# EAGLE board untitled2 (EAGLE 6.0)

Size 81.28 x 81.28 mm. Coordinates in mm from the lower left corner, seen from the top.
Outline: 0,0 81.28,0 81.28,81.28 0,81.28 0,0
Copper layers (1*16): Top 0.035mm / dielectric 1.5mm / Bottom 0.035mm
Design rules: minimum track width 10mil, minimum drill 24mil, track to track 8mil, track to pad 8mil, pad to pad 8mil, via to via 8mil, smd to smd 8mil, copper to edge 30mil, drill to drill 8mil, minimum pad ring 10mil, minimum via ring 8mil, stop-mask expansion 4mil, vias tented up to drill 0mil, thermal gap 10mil

## Footprints (pad centres in the part's own frame; a part is rotated, then mirrored left to right if it is on the bottom)
LED3MM = drill 0.813 octagon: A -1.27,0; K 1.27,0

## Placement (x,y rotation side)
E$1  [LED3MM]  2.54,2.54 0 top
E$2  [LED3MM]  7.62,2.54 0 top
E$3  [LED3MM]  12.7,2.54 0 top
E$4  [LED3MM]  17.78,2.54 0 top
E$5  [LED3MM]  2.54,7.62 0 top
E$6  [LED3MM]  7.62,7.62 0 top
E$7  [LED3MM]  12.7,7.62 0 top
E$8  [LED3MM]  17.78,7.62 0 top
E$9  [LED3MM]  2.54,12.7 0 top
E$10  [LED3MM]  7.62,12.7 0 top
E$11  [LED3MM]  12.7,12.7 0 top
E$12  [LED3MM]  17.78,12.7 0 top
E$13  [LED3MM]  2.54,17.78 0 top
E$14  [LED3MM]  7.62,17.78 0 top
E$15  [LED3MM]  12.7,17.78 0 top
E$16  [LED3MM]  17.78,17.78 0 top
E$17  [LED3MM]  22.86,2.54 0 top
E$18  [LED3MM]  27.94,2.54 0 top
E$19  [LED3MM]  33.02,2.54 0 top
E$20  [LED3MM]  38.1,2.54 0 top
E$21  [LED3MM]  22.86,7.62 0 top
E$22  [LED3MM]  27.94,7.62 0 top
E$23  [LED3MM]  33.02,7.62 0 top
E$24  [LED3MM]  38.1,7.62 0 top
E$25  [LED3MM]  22.86,12.7 0 top
E$26  [LED3MM]  27.94,12.7 0 top
E$27  [LED3MM]  33.02,12.7 0 top
E$28  [LED3MM]  38.1,12.7 0 top
E$29  [LED3MM]  22.86,17.78 0 top
E$30  [LED3MM]  27.94,17.78 0 top
E$31  [LED3MM]  33.02,17.78 0 top
E$32  [LED3MM]  38.1,17.78 0 top
E$33  [LED3MM]  2.54,22.86 0 top
E$34  [LED3MM]  7.62,22.86 0 top
E$35  [LED3MM]  12.7,22.86 0 top
E$36  [LED3MM]  17.78,22.86 0 top
E$37  [LED3MM]  2.54,27.94 0 top
E$38  [LED3MM]  7.62,27.94 0 top
E$39  [LED3MM]  12.7,27.94 0 top
E$40  [LED3MM]  17.78,27.94 0 top
E$41  [LED3MM]  2.54,33.02 0 top
E$42  [LED3MM]  7.62,33.02 0 top
E$43  [LED3MM]  12.7,33.02 0 top
E$44  [LED3MM]  17.78,33.02 0 top
E$45  [LED3MM]  2.54,38.1 0 top
E$46  [LED3MM]  7.62,38.1 0 top
E$47  [LED3MM]  12.7,38.1 0 top
E$48  [LED3MM]  17.78,38.1 0 top
E$49  [LED3MM]  22.86,22.86 0 top
E$50  [LED3MM]  27.94,22.86 0 top
E$51  [LED3MM]  33.02,22.86 0 top
E$52  [LED3MM]  38.1,22.86 0 top
E$53  [LED3MM]  22.86,27.94 0 top
E$54  [LED3MM]  27.94,27.94 0 top
E$55  [LED3MM]  33.02,27.94 0 top
E$56  [LED3MM]  38.1,27.94 0 top
E$57  [LED3MM]  22.86,33.02 0 top
E$58  [LED3MM]  27.94,33.02 0 top
E$59  [LED3MM]  33.02,33.02 0 top
E$60  [LED3MM]  38.1,33.02 0 top
E$61  [LED3MM]  22.86,38.1 0 top
E$62  [LED3MM]  27.94,38.1 0 top
E$63  [LED3MM]  33.02,38.1 0 top
E$64  [LED3MM]  38.1,38.1 0 top
E$65  [LED3MM]  2.54,43.18 0 top
E$66  [LED3MM]  7.62,43.18 0 top
E$67  [LED3MM]  12.7,43.18 0 top
E$68  [LED3MM]  17.78,43.18 0 top
E$69  [LED3MM]  2.54,48.26 0 top
E$70  [LED3MM]  7.62,48.26 0 top
E$71  [LED3MM]  12.7,48.26 0 top
E$72  [LED3MM]  17.78,48.26 0 top
E$73  [LED3MM]  2.54,53.34 0 top
E$74  [LED3MM]  7.62,53.34 0 top
E$75  [LED3MM]  12.7,53.34 0 top
E$76  [LED3MM]  17.78,53.34 0 top
E$77  [LED3MM]  2.54,58.42 0 top
E$78  [LED3MM]  7.62,58.42 0 top
E$79  [LED3MM]  12.7,58.42 0 top
E$80  [LED3MM]  17.78,58.42 0 top
E$81  [LED3MM]  22.86,43.18 0 top
E$82  [LED3MM]  27.94,43.18 0 top
E$83  [LED3MM]  33.02,43.18 0 top
E$84  [LED3MM]  38.1,43.18 0 top
E$85  [LED3MM]  22.86,48.26 0 top
E$86  [LED3MM]  27.94,48.26 0 top
E$87  [LED3MM]  33.02,48.26 0 top
E$88  [LED3MM]  38.1,48.26 0 top
E$89  [LED3MM]  22.86,53.34 0 top
E$90  [LED3MM]  27.94,53.34 0 top
E$91  [LED3MM]  33.02,53.34 0 top
E$92  [LED3MM]  38.1,53.34 0 top
E$93  [LED3MM]  22.86,58.42 0 top
E$94  [LED3MM]  27.94,58.42 0 top
E$95  [LED3MM]  33.02,58.42 0 top
E$96  [LED3MM]  38.1,58.42 0 top
E$97  [LED3MM]  2.54,63.5 0 top
E$98  [LED3MM]  7.62,63.5 0 top
E$99  [LED3MM]  12.7,63.5 0 top
E$100  [LED3MM]  17.78,63.5 0 top
E$101  [LED3MM]  2.54,68.58 0 top
E$102  [LED3MM]  7.62,68.58 0 top
E$103  [LED3MM]  12.7,68.58 0 top
E$104  [LED3MM]  17.78,68.58 0 top
E$105  [LED3MM]  2.54,73.66 0 top
E$106  [LED3MM]  7.62,73.66 0 top
E$107  [LED3MM]  12.7,73.66 0 top
E$108  [LED3MM]  17.78,73.66 0 top
E$109  [LED3MM]  2.54,78.74 0 top
E$110  [LED3MM]  7.62,78.74 0 top
E$111  [LED3MM]  12.7,78.74 0 top
E$112  [LED3MM]  17.78,78.74 0 top
E$113  [LED3MM]  22.86,63.5 0 top
E$114  [LED3MM]  27.94,63.5 0 top
E$115  [LED3MM]  33.02,63.5 0 top
E$116  [LED3MM]  38.1,63.5 0 top
E$117  [LED3MM]  22.86,68.58 0 top
E$118  [LED3MM]  27.94,68.58 0 top
E$119  [LED3MM]  33.02,68.58 0 top
E$120  [LED3MM]  38.1,68.58 0 top
E$121  [LED3MM]  22.86,73.66 0 top
E$122  [LED3MM]  27.94,73.66 0 top
E$123  [LED3MM]  33.02,73.66 0 top
E$124  [LED3MM]  38.1,73.66 0 top
E$125  [LED3MM]  22.86,78.74 0 top
E$126  [LED3MM]  27.94,78.74 0 top
E$127  [LED3MM]  33.02,78.74 0 top
E$128  [LED3MM]  38.1,78.74 0 top
E$129  [LED3MM]  43.18,2.54 0 top
E$130  [LED3MM]  48.26,2.54 0 top
E$131  [LED3MM]  53.34,2.54 0 top
E$132  [LED3MM]  58.42,2.54 0 top
E$133  [LED3MM]  43.18,7.62 0 top
E$134  [LED3MM]  48.26,7.62 0 top
E$135  [LED3MM]  53.34,7.62 0 top
E$136  [LED3MM]  58.42,7.62 0 top
E$137  [LED3MM]  43.18,12.7 0 top
E$138  [LED3MM]  48.26,12.7 0 top
E$139  [LED3MM]  53.34,12.7 0 top
E$140  [LED3MM]  58.42,12.7 0 top
E$141  [LED3MM]  43.18,17.78 0 top
E$142  [LED3MM]  48.26,17.78 0 top
E$143  [LED3MM]  53.34,17.78 0 top
E$144  [LED3MM]  58.42,17.78 0 top
E$145  [LED3MM]  63.5,2.54 0 top
E$146  [LED3MM]  68.58,2.54 0 top
E$147  [LED3MM]  73.66,2.54 0 top
E$148  [LED3MM]  78.74,2.54 0 top
E$149  [LED3MM]  63.5,7.62 0 top
E$150  [LED3MM]  68.58,7.62 0 top
E$151  [LED3MM]  73.66,7.62 0 top
E$152  [LED3MM]  78.74,7.62 0 top
E$153  [LED3MM]  63.5,12.7 0 top
E$154  [LED3MM]  68.58,12.7 0 top
E$155  [LED3MM]  73.66,12.7 0 top
E$156  [LED3MM]  78.74,12.7 0 top
E$157  [LED3MM]  63.5,17.78 0 top
E$158  [LED3MM]  68.58,17.78 0 top
E$159  [LED3MM]  73.66,17.78 0 top
E$160  [LED3MM]  78.74,17.78 0 top
E$161  [LED3MM]  43.18,22.86 0 top
E$162  [LED3MM]  48.26,22.86 0 top
E$163  [LED3MM]  53.34,22.86 0 top
E$164  [LED3MM]  58.42,22.86 0 top
E$165  [LED3MM]  43.18,27.94 0 top
E$166  [LED3MM]  48.26,27.94 0 top
E$167  [LED3MM]  53.34,27.94 0 top
E$168  [LED3MM]  58.42,27.94 0 top
E$169  [LED3MM]  43.18,33.02 0 top
E$170  [LED3MM]  48.26,33.02 0 top
E$171  [LED3MM]  53.34,33.02 0 top
E$172  [LED3MM]  58.42,33.02 0 top
E$173  [LED3MM]  43.18,38.1 0 top
E$174  [LED3MM]  48.26,38.1 0 top
E$175  [LED3MM]  53.34,38.1 0 top
E$176  [LED3MM]  58.42,38.1 0 top
E$177  [LED3MM]  63.5,22.86 0 top
E$178  [LED3MM]  68.58,22.86 0 top
E$179  [LED3MM]  73.66,22.86 0 top
E$180  [LED3MM]  78.74,22.86 0 top
E$181  [LED3MM]  63.5,27.94 0 top
E$182  [LED3MM]  68.58,27.94 0 top
E$183  [LED3MM]  73.66,27.94 0 top
E$184  [LED3MM]  78.74,27.94 0 top
E$185  [LED3MM]  63.5,33.02 0 top
E$186  [LED3MM]  68.58,33.02 0 top
E$187  [LED3MM]  73.66,33.02 0 top
E$188  [LED3MM]  78.74,33.02 0 top
E$189  [LED3MM]  63.5,38.1 0 top
E$190  [LED3MM]  68.58,38.1 0 top
E$191  [LED3MM]  73.66,38.1 0 top
E$192  [LED3MM]  78.74,38.1 0 top
E$193  [LED3MM]  43.18,43.18 0 top
E$194  [LED3MM]  48.26,43.18 0 top
E$195  [LED3MM]  53.34,43.18 0 top
E$196  [LED3MM]  58.42,43.18 0 top
E$197  [LED3MM]  43.18,48.26 0 top
E$198  [LED3MM]  48.26,48.26 0 top
E$199  [LED3MM]  53.34,48.26 0 top
E$200  [LED3MM]  58.42,48.26 0 top
E$201  [LED3MM]  43.18,53.34 0 top
E$202  [LED3MM]  48.26,53.34 0 top
E$203  [LED3MM]  53.34,53.34 0 top
E$204  [LED3MM]  58.42,53.34 0 top
E$205  [LED3MM]  43.18,58.42 0 top
E$206  [LED3MM]  48.26,58.42 0 top
E$207  [LED3MM]  53.34,58.42 0 top
E$208  [LED3MM]  58.42,58.42 0 top
E$209  [LED3MM]  63.5,43.18 0 top
E$210  [LED3MM]  68.58,43.18 0 top
E$211  [LED3MM]  73.66,43.18 0 top
E$212  [LED3MM]  78.74,43.18 0 top
E$213  [LED3MM]  63.5,48.26 0 top
E$214  [LED3MM]  68.58,48.26 0 top
E$215  [LED3MM]  73.66,48.26 0 top
E$216  [LED3MM]  78.74,48.26 0 top
E$217  [LED3MM]  63.5,53.34 0 top
E$218  [LED3MM]  68.58,53.34 0 top
E$219  [LED3MM]  73.66,53.34 0 top
E$220  [LED3MM]  78.74,53.34 0 top
E$221  [LED3MM]  63.5,58.42 0 top
E$222  [LED3MM]  68.58,58.42 0 top
E$223  [LED3MM]  73.66,58.42 0 top
E$224  [LED3MM]  78.74,58.42 0 top
E$225  [LED3MM]  43.18,63.5 0 top
E$226  [LED3MM]  48.26,63.5 0 top
E$227  [LED3MM]  53.34,63.5 0 top
E$228  [LED3MM]  58.42,63.5 0 top
E$229  [LED3MM]  43.18,68.58 0 top
E$230  [LED3MM]  48.26,68.58 0 top
E$231  [LED3MM]  53.34,68.58 0 top
E$232  [LED3MM]  58.42,68.58 0 top
E$233  [LED3MM]  43.18,73.66 0 top
E$234  [LED3MM]  48.26,73.66 0 top
E$235  [LED3MM]  53.34,73.66 0 top
E$236  [LED3MM]  58.42,73.66 0 top
E$237  [LED3MM]  43.18,78.74 0 top
E$238  [LED3MM]  48.26,78.74 0 top
E$239  [LED3MM]  53.34,78.74 0 top
E$240  [LED3MM]  58.42,78.74 0 top
E$241  [LED3MM]  63.5,63.5 0 top
E$242  [LED3MM]  68.58,63.5 0 top
E$243  [LED3MM]  73.66,63.5 0 top
E$244  [LED3MM]  78.74,63.5 0 top
E$245  [LED3MM]  63.5,68.58 0 top
E$246  [LED3MM]  68.58,68.58 0 top
E$247  [LED3MM]  73.66,68.58 0 top
E$248  [LED3MM]  78.74,68.58 0 top
E$249  [LED3MM]  63.5,73.66 0 top
E$250  [LED3MM]  68.58,73.66 0 top
E$251  [LED3MM]  73.66,73.66 0 top
E$252  [LED3MM]  78.74,73.66 0 top
E$253  [LED3MM]  63.5,78.74 0 top
E$254  [LED3MM]  68.58,78.74 0 top
E$255  [LED3MM]  73.66,78.74 0 top
E$256  [LED3MM]  78.74,78.74 0 top

## Library data of the parts
E$1-E$256 = led

## Nets
S$1: E$1.A E$5.A E$9.A E$13.A E$33.A E$37.A E$41.A E$45.A E$65.A E$69.A E$73.A E$77.A E$97.A E$101.A E$105.A
S$2: E$2.A E$6.A E$10.A E$14.A E$34.A E$38.A E$42.A E$46.A E$66.A E$70.A E$74.A E$78.A E$98.A E$102.A E$110.A
S$3: E$3.A E$7.A E$11.A E$15.A E$35.A E$39.A E$43.A E$47.A E$67.A E$71.A E$75.A E$79.A E$99.A E$107.A E$111.A
S$4: E$4.A E$8.A E$12.A E$16.A E$36.A E$40.A E$44.A E$48.A E$68.A E$72.A E$76.A E$80.A E$104.A E$108.A E$112.A
S$5: E$17.A E$21.A E$25.A E$29.A E$49.A E$53.A E$57.A E$61.A E$81.A E$85.A E$89.A E$113.A E$117.A E$121.A E$125.A
S$6: E$18.A E$22.A E$26.A E$30.A E$50.A E$54.A E$58.A E$62.A E$82.A E$86.A E$94.A E$114.A E$118.A E$122.A E$126.A
S$7: E$19.A E$23.A E$27.A E$31.A E$51.A E$55.A E$59.A E$63.A E$83.A E$91.A E$95.A E$115.A E$119.A E$123.A E$127.A
S$8: E$84.A E$87.A E$90.A E$93.A E$100.A E$103.A E$106.A E$109.A E$148.A E$151.A E$154.A E$157.A E$164.A E$167.A E$170.A E$173.A
S$9: E$152.A E$156.A E$160.A E$180.A E$184.A E$188.A E$192.A E$212.A E$216.A E$220.A E$224.A E$244.A E$248.A E$252.A E$256.A
S$10: E$147.A E$155.A E$159.A E$179.A E$183.A E$187.A E$191.A E$211.A E$215.A E$219.A E$223.A E$243.A E$247.A E$251.A E$255.A
S$11: E$146.A E$150.A E$158.A E$178.A E$182.A E$186.A E$190.A E$210.A E$214.A E$218.A E$222.A E$242.A E$246.A E$250.A E$254.A
S$12: E$145.A E$149.A E$153.A E$177.A E$181.A E$185.A E$189.A E$209.A E$213.A E$217.A E$221.A E$241.A E$245.A E$249.A E$253.A
S$13: E$132.A E$136.A E$140.A E$144.A E$168.A E$172.A E$176.A E$196.A E$200.A E$204.A E$208.A E$228.A E$232.A E$236.A E$240.A
S$14: E$131.A E$135.A E$139.A E$143.A E$163.A E$171.A E$175.A E$195.A E$199.A E$203.A E$207.A E$227.A E$231.A E$235.A E$239.A
S$15: E$130.A E$134.A E$138.A E$142.A E$162.A E$166.A E$174.A E$194.A E$198.A E$202.A E$206.A E$226.A E$230.A E$234.A E$238.A
S$16: E$129.A E$133.A E$137.A E$141.A E$161.A E$165.A E$169.A E$193.A E$197.A E$201.A E$205.A E$225.A E$229.A E$233.A E$237.A
S$17: E$20.A E$24.A E$28.A E$32.A E$52.A E$56.A E$60.A E$64.A E$88.A E$92.A E$96.A E$116.A E$120.A E$124.A E$128.A
S$18: E$1.K E$2.K E$3.K E$4.K E$17.K E$18.K E$19.K E$20.K E$129.K E$130.K E$131.K E$132.K E$145.K E$146.K E$147.K E$148.K
S$19: E$5.K E$6.K E$7.K E$8.K E$21.K E$22.K E$23.K E$24.K E$133.K E$134.K E$135.K E$136.K E$149.K E$150.K E$151.K E$152.K
S$20: E$9.K E$10.K E$11.K E$12.K E$25.K E$26.K E$27.K E$28.K E$137.K E$138.K E$139.K E$140.K E$153.K E$154.K E$155.K E$156.K
S$21: E$13.K E$14.K E$15.K E$16.K E$29.K E$30.K E$31.K E$32.K E$141.K E$142.K E$143.K E$144.K E$157.K E$158.K E$159.K E$160.K
S$22: E$33.K E$34.K E$35.K E$36.K E$49.K E$50.K E$51.K E$52.K E$161.K E$162.K E$163.K E$164.K E$177.K E$178.K E$179.K E$180.K
S$23: E$37.K E$38.K E$39.K E$40.K E$53.K E$54.K E$55.K E$56.K E$165.K E$166.K E$167.K E$168.K E$181.K E$182.K E$183.K E$184.K
S$24: E$41.K E$42.K E$43.K E$44.K E$57.K E$58.K E$59.K E$60.K E$169.K E$170.K E$171.K E$172.K E$185.K E$186.K E$187.K E$188.K
S$25: E$45.K E$46.K E$47.K E$48.K E$61.K E$62.K E$63.K E$64.K E$173.K E$174.K E$175.K E$176.K E$189.K E$190.K E$191.K E$192.K
S$26: E$65.K E$66.K E$67.K E$68.K E$81.K E$82.K E$83.K E$84.K E$193.K E$194.K E$195.K E$196.K E$209.K E$210.K E$211.K E$212.K
S$27: E$69.K E$70.K E$71.K E$72.K E$85.K E$86.K E$87.K E$88.K E$197.K E$198.K E$199.K E$200.K E$213.K E$214.K E$215.K E$216.K
S$28: E$73.K E$74.K E$75.K E$76.K E$89.K E$90.K E$91.K E$92.K E$201.K E$202.K E$203.K E$204.K E$217.K E$218.K E$219.K E$220.K
S$29: E$77.K E$78.K E$79.K E$80.K E$93.K E$94.K E$95.K E$96.K E$205.K E$206.K E$207.K E$208.K E$221.K E$222.K E$223.K E$224.K
S$30: E$97.K E$98.K E$99.K E$100.K E$113.K E$114.K E$115.K E$116.K E$225.K E$226.K E$227.K E$228.K E$241.K E$242.K E$243.K E$244.K
S$31: E$101.K E$102.K E$103.K E$104.K E$117.K E$118.K E$119.K E$120.K E$229.K E$230.K E$231.K E$232.K E$245.K E$246.K E$247.K E$248.K
S$32: E$105.K E$106.K E$107.K E$108.K E$121.K E$122.K E$123.K E$124.K E$233.K E$234.K E$235.K E$236.K E$249.K E$250.K E$251.K E$252.K
S$33: E$109.K E$110.K E$111.K E$112.K E$125.K E$126.K E$127.K E$128.K E$237.K E$238.K E$239.K E$240.K E$253.K E$254.K E$255.K E$256.K

## Tracks (layer width: path | path; a pad name or v marks a point on that pad's centre or on a via)
S$1  (14 unrouted)
S$2  (14 unrouted)
S$3  (14 unrouted)
S$4  (14 unrouted)
S$5  (14 unrouted)
S$6  (14 unrouted)
S$7  (14 unrouted)
S$8  (15 unrouted)
S$9  (14 unrouted)
S$10  (14 unrouted)
S$11  (14 unrouted)
S$12  (14 unrouted)
S$13  (14 unrouted)
S$14  (14 unrouted)
S$15  (14 unrouted)
S$16  (14 unrouted)
S$17  (14 unrouted)
S$18  (15 unrouted)
S$19  (15 unrouted)
S$20  (15 unrouted)
S$21  (15 unrouted)
S$22  (15 unrouted)
S$23  (15 unrouted)
S$24  (15 unrouted)
S$25  (15 unrouted)
S$26  (15 unrouted)
S$27  (15 unrouted)
S$28  (15 unrouted)
S$29  (15 unrouted)
S$30  (15 unrouted)
S$31  (15 unrouted)
S$32  (15 unrouted)
S$33  (15 unrouted)